# Altium PCB 7688_Board_for_Inner_testing.PcbDoc (part 1 of 2)
Units mil, origin at the board's own origin, x right, y up, seen from the top; angles counter-clockwise.
Board outline 3359.02 x 2098.03 mil, 2 copper layers (Top Layer, Bottom Layer), stack 12.8 mil thick; 105 components, 110 nets, 499 pads, 215 vias.
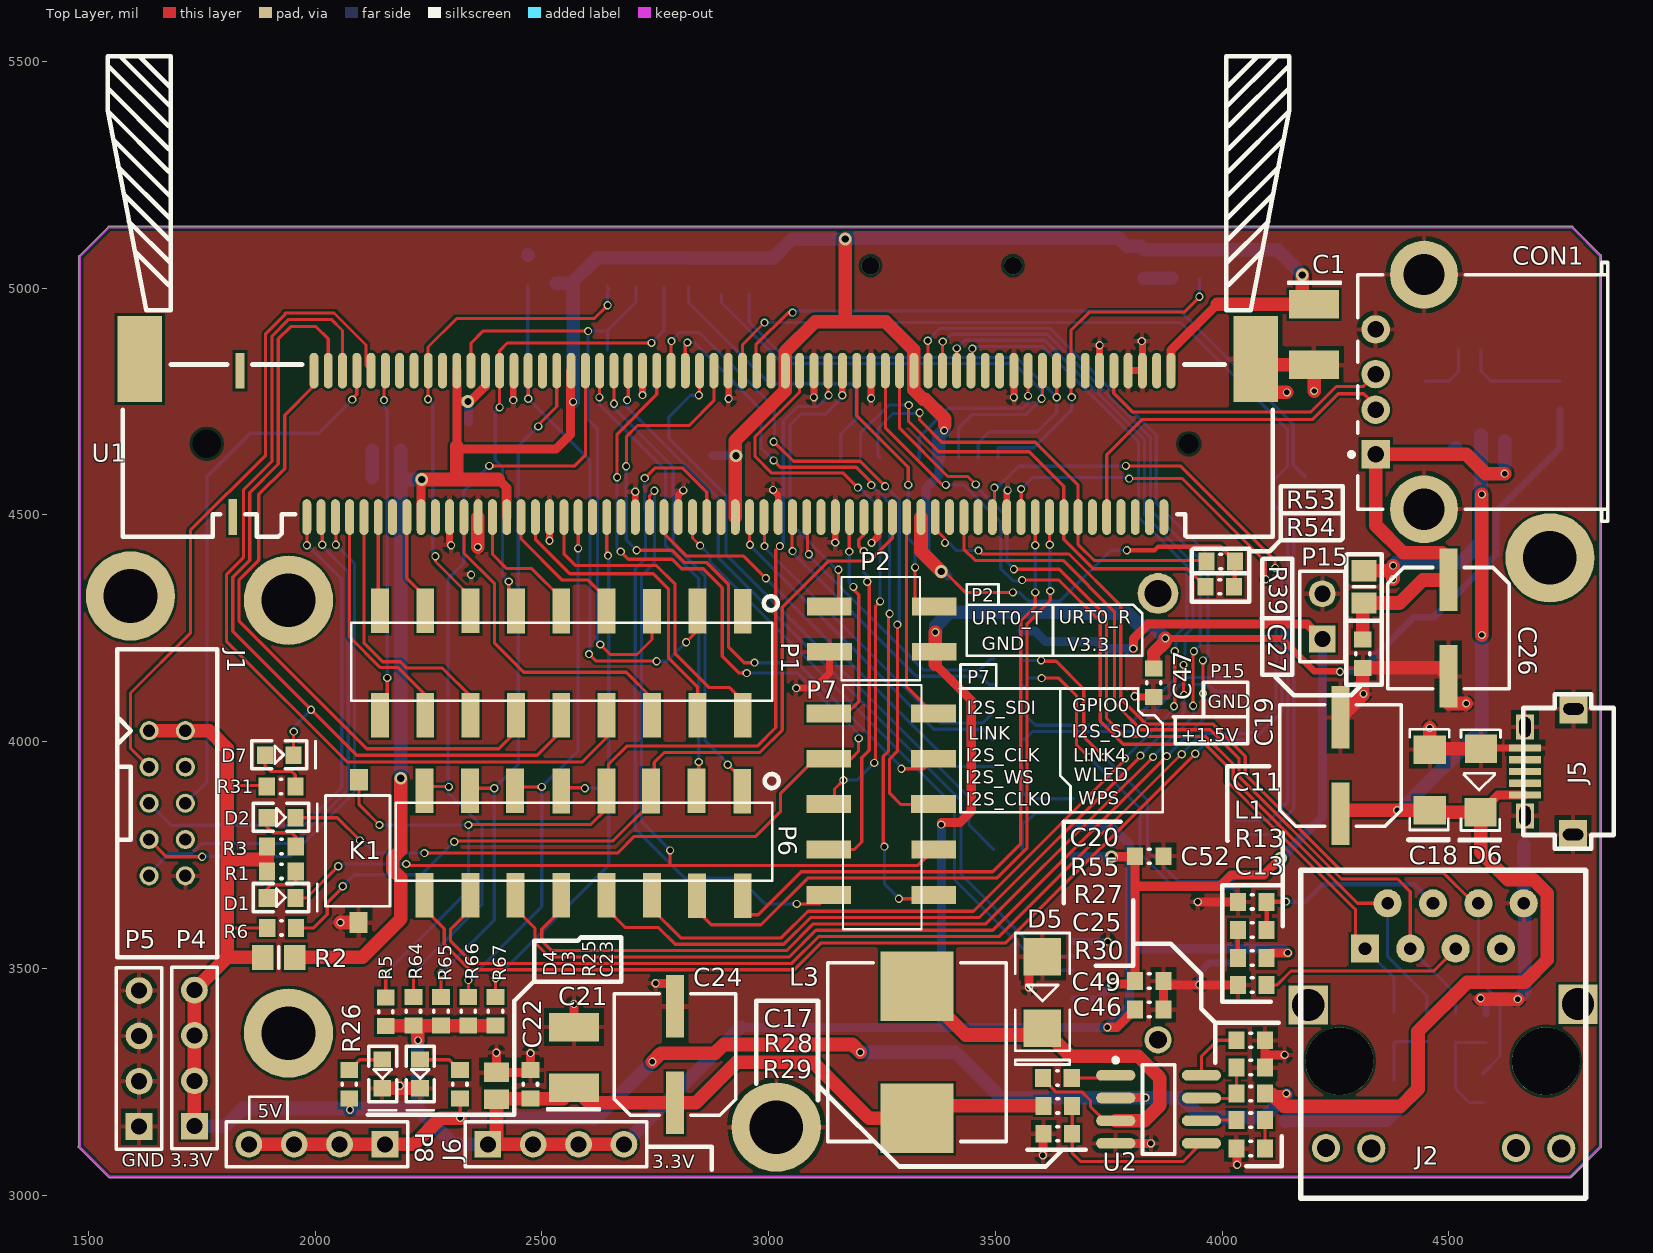
[diagram p0: Top Layer view]
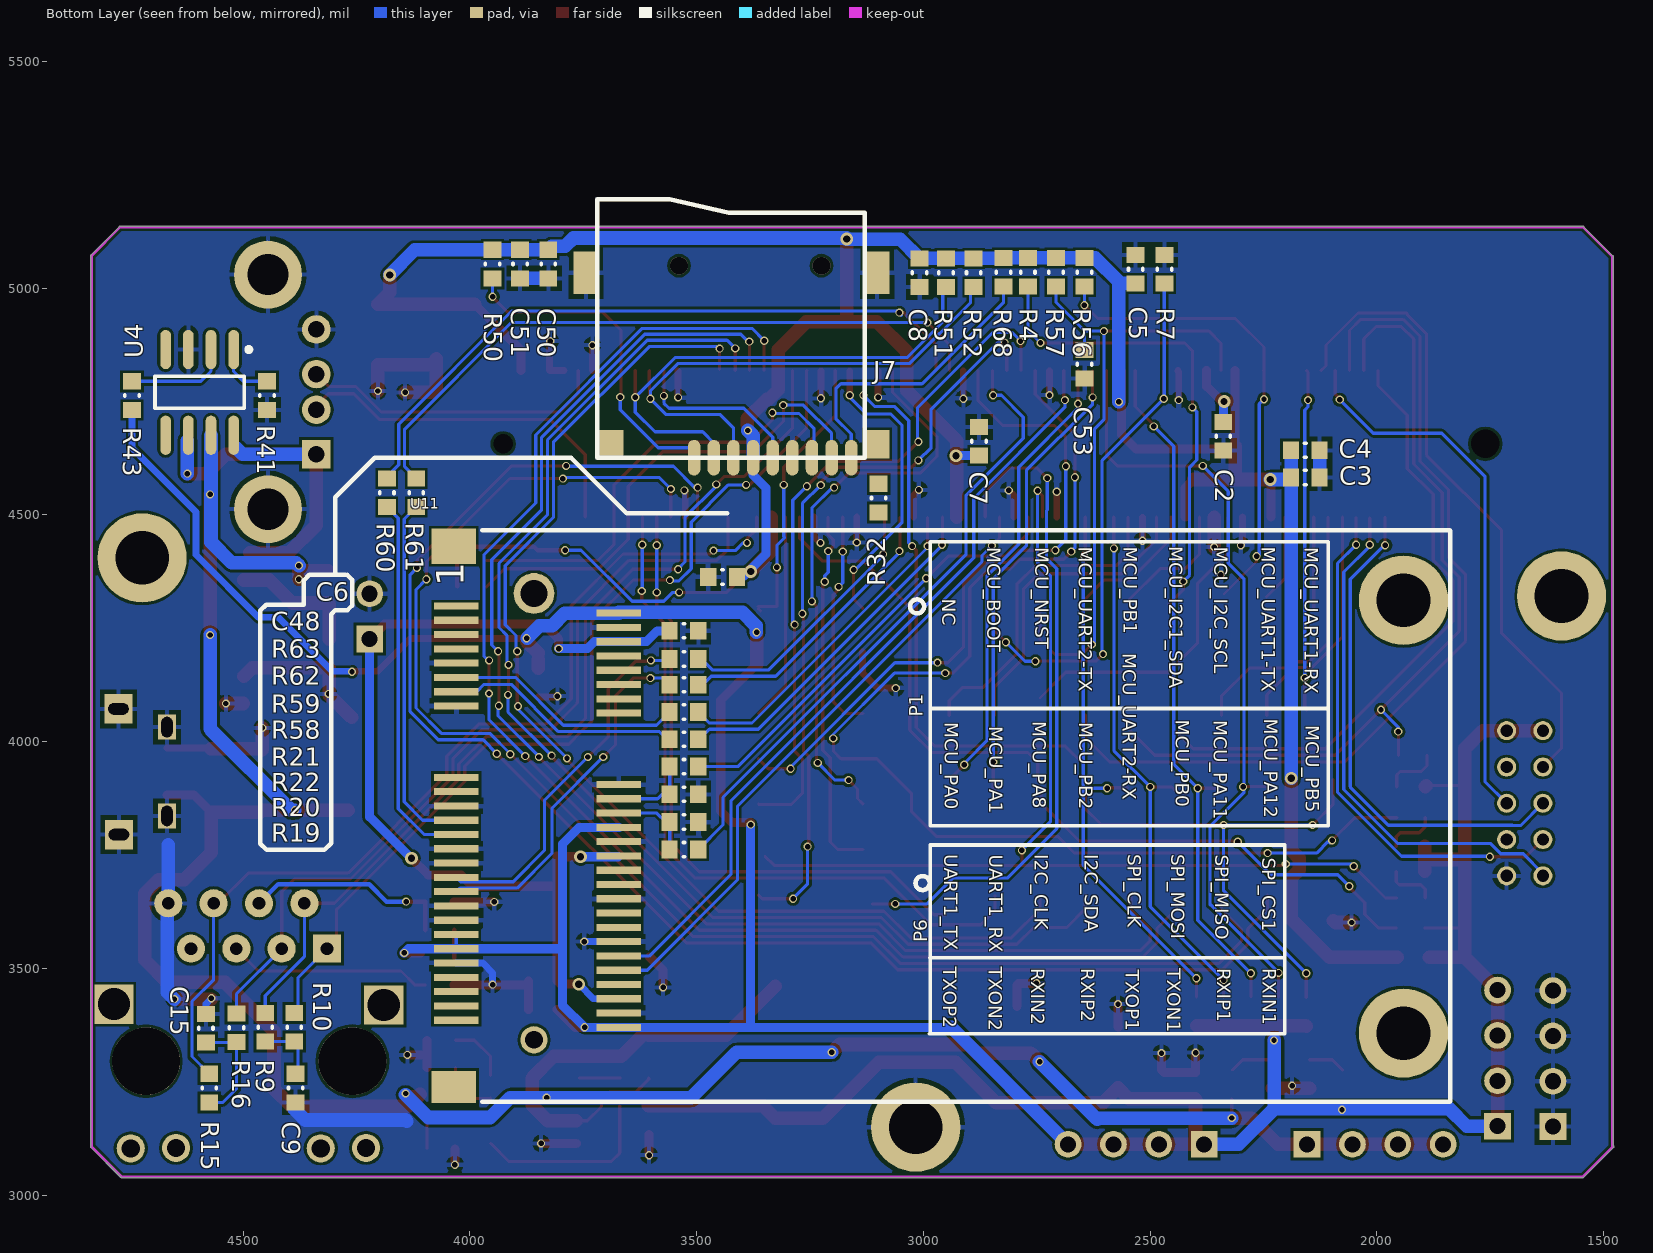
[diagram p1: Bottom Layer view, seen from below]

## Layer stack, top to bottom
Top Solder: solder mask 0.4, Solder Resist, Dk 3.5
Top Layer: signal copper 1.4
Dielectric 1: core 10, FR-4, Dk 4.2
Bottom Layer: signal copper 1.4
Bottom Solder: solder mask 0.4, Solder Resist, Dk 3.5

## Board outline
1478.22,3105.22 cw(c1480,3107) 1478.48,3109.01 1478.48,5069 cw(c1481,5069) 1479.22,5070.78 1544.22,5135.78 cw(c1546,5134) 1546,5136.52 4771,5136.52 cw(c4771,5134) 4772.78,5135.78 4835.78,5072.78 cw(c4834,5071) 4836.52,5071 4836.52,3107 cw(c4834,3107) 4835.78,3105.22 4769.78,3039.22 cw(c4768,3041) 4768,3038.49 1546,3038.49 cw(c1546,3041) 1544.22,3039.22

## Design rules (kind name [scope] priority, off if disabled: settings)
Clearance [All] p1: gap=6
HoleSize [All] p1: absolutevalues=TRUE maxlimit=500 minlimit=1 maxpercent=80.000 minpercent=20.000
HoleToHoleClearance [All] p1: gap=4 allowstackedmicrovias=TRUE
MinimumSolderMaskSliver [All] p1: minsoldermaskwidth=2
PolygonConnect [All] p1: connectstyle=Relief reliefconductorwidth=10 reliefentries=4 polygonreliefangle="90 Angle" airgapwidth=10
RoutingVias [All] p1: holewidth=12 width=18 viastyle="Through Hole" minholewidth=10 minwidth=12 maxholewidth=28 maxwidth=50
SilkToSilkClearance [All] p1: silktosilkclearance=0
SilkToSolderMaskClearance [IsPad] p1: minsilkscreentomaskgap=0 clearancetoexposedcopper=TRUE
SolderMaskExpansion [All] p1: expansion=4
UnpouredPolygon [All] p1: allowunpoured=FALSE
Width [All] p1: maxlimit=30 minlimit=4 preferedwidth=8
24 further rules are at their usual default settings.

## Classes and differential pairs
component class Designator: C1 C2 C3 C4 C5 C6 C7 C8 D1 D2 J1 K1 P1 P2 P4 P5 P6 P7 P8 R1 R2 R3 R4 R5 R6 R7 R56 R57 R64 R65 R66 R67 U1
component class MAIN: R19 R20 R21 R22 R58 R59 R60 R61 R62 R63

## Components (designator, comment, footprint, x,y, rotation, side; value= is the part's Value field where it differs from the comment)
C1 "Cap Pol1" C1210-A 4206,4906 r270 top
C2 "Cap" R0603N 2337,4673 r270 bottom
C3 "Cap" R0603N 2158,4584 r180 bottom
C4 "Cap" R0603N 2158,4644 r180 bottom
C5 "Cap" R0603N 2533.86,5041.69 r90 bottom
C6 "Cap" R0603N 3443,4361 r0 bottom
C7 "Cap" R0603N 2879,4662 r90 bottom
C8 "Cap" R0603N 3007,5034 r270 bottom
C9 "C0603" R0603N 4386,3236 r90 bottom
C11 "C0603" R0603N 4066.54,3648.25 r0 top
C13 "C0603" R0603N 4066.6,3461.25 r180 top
C15 "C0603" R0603N 4584,3368 r90 bottom
C17 "C0603N" R0603N 3637,3260 r0 top
C18 "C0805" C1206-A 4456,3919 r270 top
C19 "Cap" 16V220U-tie 4261,3946 r180 top
C20 "C0603N" R0603N 4063,3343 r0 top
C21 "Cap" C1210-A 2568,3295 r90 top
C22 "C0603N" R0603N 2473,3244.01 r90 top
C23 "C0805N" C0805 2400,3241.09 r270 top
C24 "Cap" 16V220U-tie 2794,3309 r180 top
C25 "C0603N" R0603N 4063,3167 r0 top
C26 "220uF/16V" 16V220U-tie 4499,4251 r0 top
C27 "100nF" R0603N 4312,4194 r270 top
C46 "Cap" R0603N 3839.23,3411 r0 top
C47 "Cap" R0603N 3851,4130 r270 top
C48 "Cap" R0603N 3528,4246 r180 bottom
C49 "Cap" R0603N 3839.23,3474 r0 top
C50 "Cap" R0603N 3829,5053 r90 bottom
C51 "Cap" R0603N 3891,5053 r90 bottom
C52 "Cap" R0603N 3839.23,3749 r0 top
C53 "Cap" R0603N 2643,4832.19 r270 bottom (schematic designator C46)
CON1 "USB-CON" 1364372 4850,4771 r0 top locked
D1 "LED0603" LED0603 1923,3653 r0 top
D2 "LED0603" LED0603 1923,3830 r0 top
D3 "LED0603" LED0603 2229,3269 r270 top
D4 "LED0603" LED0603 2146,3269 r270 top
D5 "Diode" 403D_02 3604,3448 r270 top
D6 "4733/05w" ZMM5V1 4566,3913 r90 top
D7 "LED0603" LED0603 1919,3968 r0 top (schematic designator D4)
J1 "Header 5X2" JTAG-10PIN 1670,3864 r90 top locked
J2 "RJ-45-RH911105A" RJ-45-RH911105A 4490,3327 r270 top locked
J5 "Header 6H" MINIcro-USB-G 4772,3935 r90 top
J6 "Header 4" HDR1X4 2381,3112 r0 top
J7 "TF_CARD" TFP09-2-12B 3410,4812 r180 bottom locked
K1 "Header 2" 3*6key 2089,3755 r270 top
L1 "L0603" R0603N 4066.6,3582.76 r180 top
L3 "10uH" L10*10 3328,3314 r90 top
P1 "Head2*9" Head2*9-tie 2494,4183 r0 top locked
P2 "Head2*2" Head2*2-tie 3250,4248 r90 top locked
P4 "Header 4" HDR1X4 1734,3152 r90 top
P5 "Header 4" HDR1X4 1612,3151 r90 top
P6 "Head2*8" Head2*8_tie 2596,3822 r0 top locked
P7 "Head2*5" Head2*5-tie 3253,3889 r270 top locked
P8 "Header 4" HDR1X4 2154,3112 r180 top
P15 "Head2" HDR1X2 4221,4226 r90 top
R1 "R0603" R0603N 1926,3712 r180 top
R2 "Res Semi" 6-0805_N 1920,3524 r180 top
R3 "R0603" R0603N 1926,3767 r180 top
R4 "Res Semi" R0603N 2706,5035 r270 bottom
R5 "" R0603N 2154,3404 r90 top
R6 "" R0603N 1926,3591 r0 top
R7 "Res Semi" R0603N 2466.86,5041.69 r270 bottom
R9 "R0603" R0603N 4453,3370 r90 bottom
R10 "R0603" R0603N 4389,3370 r90 bottom
R13 "R0603" R0603N 4066.6,3521.25 r180 top
R15 "R0603" R0603N 4573,3236 r270 bottom
R16 "R0603" R0603N 4513,3369 r270 bottom
R19 "" R0603N 3528,3760 r0 bottom
R20 "" R0603N 3528,3821 r0 bottom
R21 "" R0603N 3528,3943 r0 bottom
R22 "" R0603N 3528,3882 r0 bottom
R25 "R0603" R0603N 2321,3244.07 r270 top
R26 "R0603" R0603N 2077,3244.07 r270 top
R27 "R0603N" R0603N 4063.06,3222 r180 top
R28 "R0603N" R0603N 3638,3195 r180 top
R29 "R0603N" R0603N 3638,3133.5 r180 top
R30 "R0603N" R0603N 4063.06,3101 r180 top
R31 "R0603N" R0603N 1925,3899 r180 top (schematic designator R30)
R32 "R0603N" R0603N 3097,4537 r270 bottom (schematic designator R30)
R39 "Res Semi" 6-0805_N 4313,4341 r270 top
R41 "10K" R0603N 4449,4763 r90 bottom
R43 "10K" R0603N 4747,4763 r90 bottom
R50 "Res Semi" R0603N 3952,5053 r90 bottom
R51 "Res Semi" R0603N 2952,5034 r90 bottom
R52 "Res Semi" R0603N 2891,5034 r90 bottom
R53 "Res Semi" R0603N 3997,4399 r0 top
R54 "Res Semi" r0603N 3995,4343 r0 top
R55 "R0603N" R0603N 4063,3283 r0 top
R56 "" R0603N 2643,5035 r270 bottom
R57 "" R0603N 2768,5035 r270 bottom
R58 "" R0603N 3528,4007 r180 bottom
R59 "" R0603N 3528,4067 r180 bottom
R60 "" R0603N 4185,4549 r90 bottom
R61 "" R0603N 4120,4549 r90 bottom
R62 "" R0603N 3528,4127 r180 bottom
R63 "" R0603N 3528,4184 r180 bottom
R64 "" R0603N 2215,3405 r90 top
R65 "" R0603N 2276,3405 r90 top
R66 "" R0603N 2336,3405 r90 top
R67 "" R0603N 2396,3405 r90 top
R68 "Res Semi" R0603N 2825,5035 r90 bottom (schematic designator R52)
U1 "76880-sch-yingyong" MINI-PCI-BZ 2830,4977 r0 top locked
U2 "MP1484" SO8_N 3860,3189 r0 top
U4 "MIC2025-1" SO8_N 4596,4770 r270 bottom
U11 "PCI-E MINI CARD CONNECTOR" MC2716 4030,4299 r90 bottom locked

## Footprints (in the part's own frame and the unit in brackets; to place one, negate y for a bottom-side part, rotate by r counter-clockwise, add the part's x,y. Pads: shape width x height; smd on the part's side, far side on the other; paste and mask are expansions set on the pad)
3*6key [mil]
  rect 47.24x39.37 smd: 1(154,7) 2(-161,8)
  silkscreen extent -126,-66 118,76, body extent -125,-55 116,61, height 50
6-0805_N [mm] "Chip Resistor, Body 2.0x1.2mm, IPC Medium Density"
  rect 1.2x1.4 smd: 1(-0.9,0) 2(0.9,0)
  silkscreen extent 0,-0.6 0,0.6, body extent -1.07,-0.7 1.07,0.7, height 0.7
16V220U-tie [mm]
  rect 1x3.5 smd: 1(0,2.675) 2(0,-2.725)
  silkscreen extent -3.4,-3.43 3.4,3.37, body extent -3.13,-3.17 3.15,3.12, height 6.1
403D_02 [mm]
  rect 2.1x2.1 smd: 1(-1.966,0) 2(2.034,0)
  silkscreen extent -3.3,-1.52 4.06,1.52, body extent -2.55,-1.5 2.65,1.4, height 2.1
1364372 [mm] "Connector; USB1.1, Type A, Thru-Hole; 4 Position; Right Angle"
  rect 1.6x1.6 hole 0.92: 1(-12.99,-3.5)
  round 1.6 hole 0.92: 2(-12.99,-1) 3(-12.99,1) 4(-12.99,3.5)
  round 3.8 hole 2.3: 5(-10.28,6.57) 6(-10.28,-6.57)
  silkscreen extent -14.46,-7.25 0,7.25
C0805 [mm] "Chip Capacitor, Body 2.0x1.3mm, IPC High Density"
  rect 1.1x1.4 smd: 1(-0.75,0) 2(0.75,0)
  body extent -1.1,-0.72 1.1,0.72, height 1.4
C1206-A [mm]
  rect 1.6x1.8 smd: 1(1.791,0.051) 2(-1.609,0.051)
  silkscreen extent -2.74,-1.19 3.51,1.14, body extent -1.99,-0.86 2.21,0.94, height 0.75
C1210-A [mm]
  rect 1.6x2.8 smd: 1(-1.486,-0.076) 2(1.914,-0.076)
  silkscreen extent -2.74,-1.52 -2.64,1.42, body extent -1.91,-0.97 2.29,0.83, height 0.75
HDR1X2 [mm] "Connector; Header; 2 Position"
  rect 1.5x1.5 hole 0.9: 1(0,0)
  round 1.5 hole 0.9: 2(2.54,0)
  silkscreen extent -1.27,-1.27 3.81,1.27
HDR1X4 [mm] "Connector; Header; 4 Position"
  rect 1.5x1.5 hole 0.9: 1(0,0)
  round 1.5 hole 0.9: 2(2.54,0) 3(5.08,0) 4(7.62,0)
  silkscreen extent -1.27,-1.27 8.89,1.27
Head2*2-tie [mm]
  rect 1x2.5 smd: 1(-1.27,-2.921) 2(1.27,-2.921) 3(1.27,2.942) 4(-1.27,2.937)
  silkscreen extent -2.87,-2.13 2.92,2.26, body extent -2.87,-2.17 2.95,2.26, height 8.3
Head2*5-tie [mm]
  rect 1x2.5 smd: 1(-4.394,-3.048) 2(-1.854,-3.048) 3(0.686,-3.048) 4(3.226,-3.048) 5(5.766,-3.048) 6(5.766,2.819) 7(3.226,2.819) 8(0.686,2.81) 9(-1.854,2.815) 10(-4.394,2.81)
  silkscreen extent -5.99,-2.26 7.7,2.13, body extent -5.99,-2.29 7.7,2.13, height 8.3
Head2*8_tie [mm]
  rect 1x2.5 smd: 1(-9.017,-4.089) 2(-6.426,-4.089) 3(-3.912,-4.089) 4(-1.346,-4.089) 5(1.194,-4.089) 6(3.734,-4.089) 7(6.248,-4.115) 8(8.814,-4.115) 9(8.788,1.748) 10(6.223,1.768) 11(3.683,1.753) 12(1.194,1.753) 13(-1.346,1.753) 14(-3.937,1.768) 15(-6.452,1.773) 16(-9.017,1.768)
  silkscreen extent -10.62,-3.28 10.46,1.09, body extent -10.55,-3.33 10.46,1.09, height 8.3
Head2*9-tie [mm]
  rect 1x2.5 smd: 1(-8.915,-3.175) 2(-6.375,-3.175) 3(-3.835,-3.175) 4(-1.295,-3.175) 5(1.245,-3.175) 6(3.785,-3.175) 7(6.325,-3.175) 8(8.865,-3.175) 9(11.405,-3.175) 10(11.405,2.642) 11(8.865,2.662) 12(6.325,2.657) 13(3.785,2.667) 14(1.245,2.667) 15(-1.295,2.667) 16(-3.835,2.683) 17(-6.375,2.688) 18(-8.915,2.683)
  silkscreen extent -10.52,-2.36 13.06,2.01, body extent -10.44,-2.42 13.06,2.04, height 8.3
JTAG-10PIN [mil]
  round 42 hole 27: 1(160,36) 2(160,-44) 3(80,36) 4(80,-44) 5(0,36) 6(0,-44) 7(-80,36) 8(-80,-44) 9(-160,36) 10(-160,-44)
  silkscreen extent -340,-114 340,106
L10*10 [mm]
  rect 3.9x4.1 smd: 1(3.725,0.025) 2(-3.675,0.025)
  silkscreen extent -4.97,-4.97 5.03,5.03, body extent -4.97,-4.97 5.03,5.03, height 5
LED0603 [mm]
  rect 0.9x1 smd: 1(-0.749,0.051) 2(0.851,0.051)
  silkscreen extent -1.5,-0.71 2.08,0.86, body extent -0.82,-0.42 0.93,0.53, height 1.1
MC2716 [mm]
  round 1.524 hole 0.991: 0(-24.3,-4.35)
  round 2.286 hole 1.524: 0(0.7,-4.35)
  rect 0.4x2.5 smd: 1(0,0) 2(-0.4,-9.1) 3(-0.8,0) 4(-1.2,-9.1) 5(-1.6,0) 6(-2,-9.1) 7(-2.4,0) 8(-2.8,-9.1) 9(-3.2,0) 10(-3.6,-9.1) 11(-4,0) 12(-4.4,-9.1) 13(-4.8,0) 14(-5.2,-9.1) 15(-5.6,0) 16(-6,-9.1) 17(-9.6,0) 18(-10,-9.1) 19(-10.4,0) 20(-10.8,-9.1) 21(-11.2,0) 22(-11.6,-9.1) 23(-12,0) 24(-12.4,-9.1) 25(-12.8,0) 26(-13.2,-9.1) 27(-13.6,0) 28(-14,-9.1) 29(-14.4,0) 30(-14.8,-9.1) 31(-15.2,0) 32(-15.6,-9.1) 33(-16,0) 34(-16.4,-9.1) 35(-16.8,0) 36(-17.2,-9.1) 37(-17.6,0) 38(-18,-9.1) 39(-18.4,0) 40(-18.8,-9.1) 41(-19.2,0) 42(-19.6,-9.1) 43(-20,0) 44(-20.4,-9.1) 45(-20.8,0) 46(-21.2,-9.1) 47(-21.6,0) 48(-22,-9.1) 49(-22.4,0) 50(-22.8,-9.1) 51(-23.2,0) 52(-23.6,-9.1)
  round 5 hole 3: 53(-23.92,-53.05) 54(0.316,-53.05)
  rect 1.8x2.5 smd: 55(-26.95,0.15)
  rect 2x2.5 smd: 56(3.35,0.15)
  silkscreen extent -27.77,-55.66 4.24,-1.44
MINI-PCI-BZ [mm]
  rect 2.5x4.8 smd: 0(-30.894,-3.391) 0(31.606,-3.391)
  round 1 hole 1.6 unplated: 0(-27.144,-8.141)
  round 1 hole 1.1 unplated: 0(27.856,-8.141)
  rect 0.5x2 smd: 1(-25.694,-12.241) 2(-25.294,-4.041)
  oval 0.5x2 smd: 3(-21.544,-12.241) 4(-21.144,-4.041) 5(-20.744,-12.241) 6(-20.344,-4.041) 7(-19.944,-12.241) 8(-19.544,-4.041) 9(-19.144,-12.241) 10(-18.744,-4.041) 11(-18.344,-12.241) 12(-17.944,-4.041) 13(-17.544,-12.241) 14(-17.144,-4.041) 15(-16.744,-12.241) 16(-16.344,-4.041) 17(-15.944,-12.241) 18(-15.544,-4.041) 19(-15.144,-12.241) 20(-14.744,-4.041) 21(-14.344,-12.241) 22(-13.944,-4.041) 23(-13.544,-12.241) 24(-13.144,-4.041) 25(-12.744,-12.241) 26(-12.344,-4.041) 27(-11.944,-12.241) 28(-11.544,-4.041) 29(-11.144,-12.241) 30(-10.744,-4.041) 31(-10.344,-12.241) 32(-9.944,-4.041) 33(-9.544,-12.241) 34(-9.144,-4.041) 35(-8.744,-12.241) 36(-8.344,-4.041) 37(-7.944,-12.241) 38(-7.544,-4.041) 39(-7.144,-12.241) 40(-6.744,-4.041) 41(-6.344,-12.241) 42(-5.944,-4.041) 43(-5.544,-12.241) 44(-5.144,-4.041) 45(-4.744,-12.241) 46(-4.344,-4.041) 47(-3.944,-12.241) 48(-3.544,-4.041) 49(-3.144,-12.241) 50(-2.744,-4.041) 51(-2.344,-12.241) 52(-1.944,-4.041) 53(-1.544,-12.241) 54(-1.144,-4.041) 55(-0.744,-12.241) 56(-0.344,-4.041) 57(0.056,-12.241) 58(0.456,-4.041) 59(0.856,-12.241) 60(1.256,-4.041) 61(1.656,-12.241) 62(2.056,-4.041) 63(2.456,-12.241) 64(2.856,-4.041) 65(3.256,-12.241) 66(3.656,-4.041) 67(4.056,-12.241) 68(4.456,-4.041) 69(4.856,-12.241) 70(5.256,-4.041) 71(5.656,-12.241) 72(6.056,-4.041) 73(6.456,-12.241) 74(6.856,-4.041) 75(7.256,-12.241) 76(7.656,-4.041) 77(8.056,-12.241) 78(8.456,-4.041) 79(8.856,-12.241) 80(9.256,-4.041) 81(9.656,-12.241) 82(10.056,-4.041) 83(10.456,-12.241) 84(10.856,-4.041) 85(11.256,-12.241) 86(11.656,-4.041) 87(12.056,-12.241) 88(12.456,-4.041) 89(12.856,-12.241) 90(13.256,-4.041) 91(13.656,-12.241) 92(14.056,-4.041) 93(14.456,-12.241) 94(14.856,-4.041) 95(15.256,-12.241) 96(15.656,-4.041) 97(16.056,-12.241) 98(16.456,-4.041) 99(16.856,-12.241) 100(17.256,-4.041) 101(17.656,-12.241) 102(18.056,-4.041) 103(18.456,-12.241) 104(18.856,-4.041) 105(19.256,-12.241) 106(19.656,-4.041) 107(20.056,-12.241) 108(20.456,-4.041) 109(20.856,-12.241) 110(21.256,-4.041) 111(21.656,-12.241) 112(22.056,-4.041) 113(22.456,-12.241) 114(22.856,-4.041) 115(23.256,-12.241) 116(23.656,-4.041) 117(24.056,-12.241) 118(24.456,-4.041) 119(24.856,-12.241) 120(25.256,-4.041) 121(25.656,-12.241) 122(26.056,-4.041) 123(26.456,-12.241) 124(26.856,-4.041)
  silkscreen extent -32.71,-13.35 33.49,13.58, body extent -31.75,-13.1 32.45,12.81, height 8.81
MINIcro-USB-G [mil]
  rect 16x70 smd: 1(-53,104) 2(-27,104) 3(-1,104) 4(25,104) 5(51,104)
  rect 65x61 hole 25 slot 45 at 90 deg: 6(-140,-2) 6(137,-3)
  rect 55x40 hole 25 slot 45 at 0 deg: 6(-99,104) 6(97,104)
  silkscreen extent -171,-92 169,108
R0603N [mm]
  rect 0.9x1 smd: 1(0.801,-0.044) 2(-0.799,-0.044)
  silkscreen extent -0.05,-0.44 0.05,0.36, body extent -0.87,-0.52 0.88,0.43, height 0.55
r0603N [mm]
  rect 0.9x1 smd: 1(0.801,-0.044) 2(-0.799,-0.044)
  silkscreen extent -0.05,-0.44 0.05,0.36, body extent -0.87,-0.52 0.88,0.43, height 0.55
RJ-45-RH911105A [mil]
  rect 86.61x86.61 hole 70.87: 0(-94,295) 0(-92,-300)
  round 149.61 hole 149.61: 0(32,224) 0(32,-231)
  rect 62x62 hole 28: 1(-216.37,-174.89)
  round 62 hole 28: 2(-316.37,-124.89) 3(-216.37,-74.89) 4(-316.37,-24.89) 5(-216.37,25.11) 6(-316.37,75.11) 7(-216.37,125.11) 8(-316.37,175.11)
  round 62 hole 40: 9(223,-261) 10(224,-161) 11(223,158) 12(224,258)
  silkscreen extent -389,-317 334,312, body extent -385,-302 351,304, height 550
SO8_N [mm] "SOIC, 8-Leads, Body 4.9x3.9mm, Pitch 1.27mm, IPC Medium Density"
  oval 2.2x0.6 smd: 1(-2.4,1.905) 2(-2.4,0.635) 3(-2.4,-0.635) 4(-2.4,-1.905) 5(2.4,-1.905) 6(2.4,-0.635) 7(2.4,0.635) 8(2.4,1.905)
  silkscreen extent -2.52,-2.5 0.9,2.88, body extent -2,-2.5 2,2.5, height 1.75
TFP09-2-12B [mm]
  oval 0.7x2 smd: 1(-2.429,-4.724) 2(-1.329,-4.724) 3(-0.229,-4.724) 4(0.871,-4.724) 5(1.971,-4.724) 6(3.071,-4.724) 7(4.171,-4.724) 8(5.271,-4.724) 9(6.371,-4.724)
  rect 1.4x1.6 smd: 10(-7.079,-3.97) 11(7.825,-3.97)
  rect 1.4x2.4 smd: 12(-8.487,5.63) 13(7.825,5.63)
  silkscreen extent -7.85,-4.72 7.14,9.75
ZMM5V1 [mil]
  rect 62.99x70.87 smd: 1(71,-5) 2(-69,-4)
  silkscreen extent -133,-48 113,44, body extent -82,-40 83,31, height 30

## Part data
C1: "Polarized Capacitor (Radial)"
C2 C3 C4 C5 C6 C7 C8 C19 C21 C24 C46 C47 C48 C49 C50 C51 C52 C53: "Capacitor"
C9 C11 C13 C15 C18: library part "Cap Semi", "Capacitor (Semiconductor SIM Model)"
C17 C20 C22 C23 C25: library part Cap, "Capacitor"
C26: library part "Cap Pol1", "Polarized Capacitor (Radial)"
C27: library part CAP
D1 D2 D3 D4 D7: library part LED, "LED"
D5: "Default Diode"
D6: library part Diode, "Default Diode"
J1: "Header, 5-Pin, Dual row"
J5: "Header, 6-Pin, Right Angle"
J6 P4 P5 P8: "Header, 4-Pin"
J7 U2: library part Component_1
K1: "Header, 2-Pin"
L1 L3: library part Inductor, "Inductor"
R1 R3 R5 R6 R9 R10 R13 R15 R16 R19 R20 R21 R22 R25 R26 R56 R57 R58 R59 R60 R61 R62 R63 R64 R65 R66 R67: library part "Res Semi", "Semiconductor Resistor"
R2 R4 R7 R39 R50 R51 R52 R53 R54 R68: "Semiconductor Resistor"
R27 R28 R29 R30 R31 R32 R55: library part Res2, "Resistor"
R41 R43: library part RES

## Free pads (board coordinates)
  round 196.85 hole 118.11: 0(1593,4321) 0(3017,3150) 0(4723,4405)

## Via types
v1: diameter 18, hole 12, Top Layer to Bottom Layer, 203 vias
v2: diameter 28, hole 16, Top Layer to Bottom Layer, 10 vias
v3: diameter 39.37, hole 39.37, Top Layer to Bottom Layer, 2 vias

## Nets (pads, with @x,y where several pads share a name; then routed paths per layer and width w, separated by ;. In a path a pad name is that pad's centre, name@x,y a point inside that pad or via, vN(x,y) a via of type N, cw(c..) or ccw(c..) an arc to the next point about the centre after c; other vN are vias at no path point)
+1.5V: C48.2 C49.2 C52.2 P15.1 U11.6 U11.28 U11.48 | length 2161.3
  Top Layer w20: v2(3756,3746) C52.2@3802.28,3746 ; v2(3760,3465) C49.2@3800.51,3465 ; v1(3804.24,4204.93) 3804.24,4226.24 3837,4259 4188,4259 P15.1@4208,4239 ; C49.2@3807.76,3472.25 C52.2@3807.76,3747.25 ; 3811,3681 3995,3681 4020,3706 4092,3706 v2(4129,3743) ; P15.1@4221,4226 P15.1@4208,4239 ; P15.1@4232,4239 P15.1@4208,4239
  Bottom Layer w15: U11.48@3671.73,3432.86 3727.86,3432.86 v2(3760,3465)
  Bottom Layer w20: C48.2@3559.46,4244.25 3586.75,4244.25 3610.74,4220.26 U11.6@3671.73,4220.26 3725.74,4220.26 3741.07,4204.93 v1(3804.24,4204.93) ; U11.28@3673.55,3746 v2(3756,3746) ; v2@4129.5,3742.5 4221,3834 P15.1@4221,4226
C_5V: C26.1 C27.2 CON1.1 R39.2 U4.6 U4.8 | length 1168.7
  Top Layer w30: C27.2@4310.25,4225.46 R39.2@4310.25,4302.82 ; R39.2@4313,4305.57 4391.57,4305.57 4442.3,4356.3 C26.1@4499,4356.3 ; C26.1@4484.96,4416.54 4399.38,4416.54 4338.58,4477.33 CON1.1@4338.58,4633.2 4538.8,4633.2 4581,4591 v1(4623,4591)
  Bottom Layer w30: CON1.1@4338.58,4633.2 4501.2,4633.2 U4.8@4515.24,4647.24 ; v1(4623,4591) U4.6@4623,4663.51
D0: J7.7 R53.2 U1.111 | length 1025
  Top Layer w7: v1(3333,4725) 3333,4709 3382,4660 3588,4660 3682.58,4565.42 U1.111@3682.58,4495.09 3682.58,4434.42 3717.75,4399.25 R53.2@3964.54,4399.25
  Bottom Layer w7: J7.7@3245.77,4626 3241,4630.77 3241,4690 3274.5,4723.5 3331.5,4723.5 v1(3333,4725)
D1: J7.8 R54.2 U1.109 | length 1096.8
  Top Layer w7: v1(3309,4742) 3308.5,4741.5 3308.5,4705.92 3375.42,4639 3575,4639 3651.09,4562.91 U1.109@3651.09,4495.09 3651.09,4445.91 3715.94,4381.06 3923.73,4381.06 R54.2@3963.54,4341.25
  Bottom Layer w7: J7.8@3202.47,4626 3202.47,4679.47 3265,4742 v1(3309,4742)
D2: J7.1 R50.2 U1.110 | length 748.5
  Top Layer w7: v1@3666.83,4758.17 U1.110@3666.83,4817.92 3666.83,4906.83 3707,4947 3917,4947 v1@3949,4979
  Bottom Layer w7: J7.1@3505.61,4626 3505.61,4648 3585,4648 3668.5,4731.5 v1(3668.5,4759.5) ; v1(3950,4981) R50.2@3950,5021.28
D3: J7.2 R51.2 U1.108 | length 1133.3
  Top Layer w7: v1(3635.34,4759.34) U1.108@3635.34,4817.92
  Bottom Layer w7: R51.2@2957.25,4986.54 2957.25,4925.13 3035.38,4847 3547.68,4847 v1(3635.34,4759.34) 3635.34,4726.34 3592,4683 3487,4683 3462.31,4658.31 J7.2@3462.31,4626
D7_1: D7.1 R31.2 | length 125.7
  Top Layer w7: D7.1@1889.5,3970 1889.5,3946.5 1902,3934 1949,3934 1956.46,3926.54 R31.2@1956.46,3900.75 R31.2@1956.46,3899.54
D7_2: 
DGND: C1.2 C2.1 C3.1 C4.1 C5.1 C6.1 C7.1 C8.1 C9.2 C11.2 C13.1 C15.1 C18.2 C19.2 C20.1 C21.2 C22.1 C23.1 C24.2 C26.2 C27.1 C46.1 C47.1 C48.1 C49.1 C50.2 C51.2 C52.1 C53.1 CON1.4 CON1.5 CON1.6 D3.2 D4.2 D5.1 D6.1 J1.10 J2.8 J5.5 J5.6 J7.6 J7.12 J7.13 K1.1 P2.4 P5.1 P5.2 P5.3 P5.4 P15.2 pad.0@3017,3150 R7.2 R20.2 R22.2 R29.1 R30.1 R41.2 R55.1 U1.0@4074.32,4843.51 U1.23 U1.27 U1.32 U1.37 U1.49 U1.50 U1.55 U1.62 U1.69 U1.74 U1.77 U1.82 U1.83 U1.101 U1.102 U1.114 U1.118 U1.120 U2.4 U4.3 U11.4 U11.9 U11.15 U11.18 U11.21 U11.26 U11.27 U11.29 U11.34 U11.35 U11.37 U11.40 U11.43 U11.50 | length 4260.2
  Top Layer w15: v1@2296.76,4439.76 U1.23@2296.76,4495.09 ; v1(2437,4753) 2437,4815.41 2439,4817.41 U1.32@2438.49,4817.92 ; v1(2517,4443) U1.37@2517,4494.86 ; U1.49@2706.2,4495.09 v1@2706.2,4550.8 ; v1(2722,4764) U1.50@2721.95,4817.92 ; U1.55@2800.69,4495.09 2800.69,4542.69 v1(2812,4554) ; v1(2912,4756) U1.62@2912,4816.85 ; v1(3010,4555) 3021.17,4543.83 U1.69@3021.17,4495.09 ; v1(3061,4118) 3101,4118 3134.39,4151.39 P2.4@3134.39,4198 ; v1(3100,4759) U1.74@3100,4817.83 ; v1(3147,4439) 3147,4494.94 U1.77@3147.15,4495.09 ; v1(3226,4757) U1.82@3226,4817.81 ; v1(3227,4438) 3241.64,4452.64 U1.83@3241.64,4495.09 ; U1.101@3525.1,4495.09 v1@3525.1,4552.1 ; v1(3541,4759) U1.102@3541,4817.77 ; U1.114@3729.83,4817.92 3729.83,4873.83 v1(3730,4874) ; U1.118@3792.82,4817.92 U1.120@3824.31,4817.92 v1@3824.31,4883 ; v1(3807,4100) 3808.53,4098.47 C47.1@3849.25,4098.47 ; D6.1@4573,3986 J5.5@4668,3986
  Top Layer w20: v1(2400,3314) C23.1@2400,3270.61 2469.83,3270.61 C22.1@2474.75,3275.54 v1@2474.75,3311.75 ; C21.2@2569.57,3370.36 C21.2@2571,3370.36 v1(2571,3421) ; v1(2751,3467) 2790,3467 2794,3463 C24.2@2794,3416.3 ; v1(3574,3458) 3574,3495.4 D5.1@3604,3525.4 ; v1(3605,3088) R29.1@3605,3133.78 ; U2.4@3765.51,3114 v1(3843,3114) ; C46.1@3870.76,3409.25 C49.1@3870.76,3472.25 ; C49.1@3880.01,3463 C13.1@4035.07,3463 ; v1@3948.5,3646.5 C11.2@4035.07,3646.5 ; v1(4033,3067) R30.1@4033,3101.28 ; R55.1@4094.53,3281.25 C20.1@4094.53,3341.25 ; 4096.53,3309 v1(4138,3309) ; D6.1@4571,3984 D6.1@4573,3986
  Top Layer w30: v1(2056,3601) 2092,3601 K1.1@2096,3605 ; D4.2@2148,3235.5 D3.2@2231,3235.5 ; v1(2359,4429) 2359.09,4429.09 U1.27@2359.09,4494.43 ; U1.0@4074.32,4843.51 4074.32,4781.69 4086,4770 v1(4143,4770) ; U1.0@4087.19,4830.64 C1.2@4203,4830.64 v1(4203,4773) ; C19.2@4261,4053.3 4310.25,4102.55 C27.1@4310.25,4162.47 4480.23,4162.47 C26.2@4499,4143.7 ; C18.2@4458,3982.36 v1(4458,4030) ; C18.2@4459.64,3984 D6.1@4571,3984 ; C26.2@4500,4084 v1(4538,4084) ; v1@4571,3432 v1(4652,3432)
  Bottom Layer w15: U11.40@3671.89,3559 v1(3748,3559) ; v1(3950,3464) 3950,3490 3971.6,3511.6 U11.43@4030,3511.6 ; v1(4570,3434) 4582.25,3421.75 C15.1@4582.25,3399.53
  Bottom Layer w30: C3.1@2126.47,4582.25 C4.1@2126.47,4642.25 ; R7.2@2468.61,5073.16 R7.2@2469.55,5072.22 ; C50.2@3827.25,5021.54 C51.2@3889.25,5021.54 ; 4139,3163 4141.64,3165.64 4363.36,3165.64 C9.2@4387.25,3189.54 ; v1(4652,3432) 4667.11,3447.11 4667.11,3641.37 J2.8@4665.11,3643.37 4665.11,3771.89
  other v1: 2187,3241 2475,3313 3946.39,3646.5 4311.88,4105 2344,4368 2300,4433 2706,4551 3527,4554 3823,4883
DM1: CON1.2 U1.115 | length 806
  Top Layer w7: U1.115@3745.57,4495.09 3745.57,4632.57 3823,4710 4199,4710 4256,4767 4312,4767 4338.58,4740.42 CON1.2@4338.58,4731.63
DP1: CON1.3 U1.116 | length 678.9
  Top Layer w7: U1.116@3761.32,4817.92 3761.32,4767.68 3802,4727 4196,4727 4252,4783 4311.21,4783 CON1.3@4338.58,4810.37
GPIO0: P7.10 U1.87 | length 457.6
  Top Layer w7: U1.87@3304.63,4495.09 3304.5,4494.96 3304.5,4121.11 P7.10@3363.61,4062
I2C_CLK: P6.11 R6.1 U1.85 | length 1916
  Top Layer w7: R6.1@1957.53,3589.25 1997.25,3589.25 2027,3619 2027,3645 v1@2062,3680 ; v1(2307,3779) 2309,3781 2657,3781 2741,3865 P6.11@2741,3891 ; P6.11@2748,3913 2748,3954 2770,3976 2980.8,3976 3030,4025.2 3030,4296.2 3132.3,4398.5 3223.5,4398.5 3273.13,4448.13 U1.85@3273.13,4495.09
  Bottom Layer w7: v1(2061,3681) 2086.5,3706.5 2234.5,3706.5 v1(2307,3779)
I2C_SDA: K1.2 P6.12 R5.1 U1.76 | length 2422
  Top Layer w7: K1.2@2097,3916 2097,3861 v1(2142,3816) ; R5.1@2156,3435.78 v1(2156,3489) ; v1@2339.5,3817.5 2608.5,3817.5 2643,3852 P6.12@2643,3891 ; P6.12@2647,3903 2647,3950 2687,3990 2975,3990 3016,4031 3016,4422 v1(3025,4431) ; v1@3131.4,4768.4 U1.76@3131.4,4817.92
  Bottom Layer w7: v1(2142,3816) v1(2338,3816) 2338,3671 v1(2156,3489) ; 3032.5,4438.5 3032.5,4707.5 3064,4739 3108,4739 v1(3132.5,4763.5)
I2S_CLK: P7.3 U1.72 | length 1269
  Top Layer w7: U1.72@3068.41,4817.92 3068.41,4770.76 2970,4672.35 2970,4629 3007,4592 3165,4592 v1(3197,4560) ; P7.3@3133,3862 3145.5,3874.5 3145.5,3895.5 v1(3165,3915) ; v1@3236,3953 3236,4299 v1(3246,4309)
  Bottom Layer w7: v1(3165,3915) 3195,3915 v1(3233,3953) ; v1(3197,4560) 3201,4560 3246,4515 v1(3246,4309)
I2S_CLK0: P7.5 U1.59 | length 1481.4
  Top Layer w7: v1(2727,4581) 2749,4603 2810.69,4603 2863.69,4550 U1.59@2863.69,4495.09 ; v1(3062,3642) 3113,3642
  Bottom Layer w7: v1(2727,4581) 2727,4511 2728.5,4509.5 2728.5,4403.5 2706,4381 2706,3808 2815,3699 2935,3699 2992,3642 v1(3062,3642)
I2S_SDI: P7.1 U1.79 | length 492.8
  Top Layer w7: P7.1@3133,4062 3173,4062 3199,4088 3199,4324 3187,4336 v1(3187,4341) ; v1(3178,4419) 3178,4494.44 U1.79@3178.65,4495.09
  Bottom Layer w7: v1(3178,4419) 3178,4350 v1(3187,4341)
I2S_SDO: P7.9 U1.60 | length 1488.7
  Top Layer w7: v1@2687,4613 2687,4673 2711,4697 2825,4697 2879.43,4751.43 U1.60@2879.43,4817.92 ; v1(2709,4422) 2787.2,4422 2814.2,4395 2863,4395 2912,4346 2912,4208 2946,4174 v1(2969,4174) ; v1(3293,3940) 3341.82,3940 P7.9@3363.82,3962
  Bottom Layer w7: v1(2686,4607) 2686,4445 v1(2709,4422) ; v1(2969,4174) 3063,4174 v1@3293,3944
I2S_WS: P7.4 U1.81 | length 817.1
  Top Layer w7: P7.4@3133,3762 3189,3762 3205.5,3778.5 3205.5,3964.5 3222,3981 3222,4348 v1(3217.5,4352.5) ; v1@3210.14,4420.14 v1(3210,4420) 3199,4431 3199,4445 3210.14,4456.14 U1.81@3210.14,4495.09
  Bottom Layer w7: v1(3210,4420) 3210,4373 3217.5,4365.5 v1(3217.5,4352.5)
LINK0: U1.48 U11.42 | length 1738.4
  Top Layer w7: v1@2690.46,4755.46 U1.48@2690.46,4817.92
  Bottom Layer w7: v1(2688,4753) 2688,4737 2889,4536 2889,4405 3424,3870 3424,3708 3605,3527 U11.42@3654,3527 ; U11.42@3650.65,3527.35 U11.42@3671.73,3527.35
LINK1: R21.2 U1.53 | length 976
  Top Layer w7: U1.53@2769.2,4495.09 2769.2,4459.8 2820,4409 2945,4409 v1(2994,4360)
  Bottom Layer w7: v1(2994,4360) 3409.25,3944.75 R21.2@3496.54,3944.75
LINK2: D2.2 P7.2 U1.52 | length 2649.9
  Top Layer w7: D2.2@1956.5,3832 2049,3832 v1(2099,3782) ; v1@2098.5,3777 v1@2099,3777 ; v1@2248,3754 2667,3754 2704,3791 2972,3791 3026,3845 3026,3885 3103,3962 P7.2@3133,3962 3182,3962 3198,3978 3198,4006 v1(3199,4007) ; v1(2666,4583) 2666,4678 2753.45,4765.45 U1.52@2753.45,4817.92 ; v1(2674,4419) 2690.8,4402.2 2787.2,4402.2 2808.4,4381 2856,4381 2898,4339 2898,4188.2 2935.2,4151 v1(2952,4151)
  Bottom Layer w7: v1(2099,3782) 2104,3777 2107,3780 2133,3754 v1(2241,3754) ; v1(2666,4583) 2666,4427 v1(2674,4419) ; v1(2952,4151) 3064,4151 3205,4010 3202,4007 v1(3199,4007)
LINK3: U1.57 U11.44 | length 1383.6
  Top Layer w7: U1.57@2832.19,4495.09 2832.19,4448.81 v1(2849,4432)
  Bottom Layer w7: v1(2849,4432) 2870.79,4410.21 2870.79,4396.79 3410,3857.58 3410,3695 3609.15,3495.85 U11.44@3671.73,3495.85
LINK4: P7.8 U1.54 | length 1536.3
  Top Layer w7: U1.54@2784.94,4817.92 v1@2784.94,4881.94 ; v1@3011.5,4661.5 3055,4618 3202,4618 v1(3257,4563) ; v1(3284,4258) 3284,3978.5 3267,3961.5 3267,3886 3292,3861 3362.61,3861 P7.8@3363.61,3862
  Bottom Layer w7: v1(2786,4883) 2786,4884 2804,4902 2847,4902 3013,4736 3013,4663 v1(3011,4661) ; v1(3257,4563) 3288,4532 3288,4262 v1(3284,4258)
MCU_BOOT: P1.11 R7.1 U1.34 | length 1238.6
  Top Layer w7: v1(2469.98,4756) U1.34@2469.98,4817.92 ; v1(2604,4193) 2619,4178 v1@2753,4178 ; v1(2818,4219) 2843,4244 P1.11@2843,4287.8
  Bottom Layer w7: R7.1@2469,5004.17 2469,4757 2606,4620 v1@2606,4201 ; v1(2753,4177) 2776,4177 v1(2818,4219)
MCU_I2C1_SCL: P1.16 R56.1 U1.20 | length 1055.9
  Top Layer w7: v1(2249,4755) U1.20@2249,4817.41 ; U1.20@2249.51,4817.92 2249,4818.43 2249,4870 2312,4933 2616,4933 v1(2645,4962) ; v1(2265.5,4408.5) 2265.5,4397.11 P1.16@2337.31,4325.31
  Bottom Layer w7: v1(2249,4755) 2259.5,4744.5 2259.5,4411.5 v1@2264,4407 ; R56.1@2644.75,5003.47 R56.1@2644.75,5004.47 ; v1(2645,4962) 2645,4995.35 R56.1@2648.93,4999.29
MCU_I2C1_SDA: P1.15 R57.1 U1.30 | length 1066.5
  Top Layer w7: v1(2407,4737) U1.30@2406.99,4817.92 ; U1.30@2406.99,4817.92 2406.99,4861.99 2424,4879 v1(2741.8,4879) ; v1(2427,4353) 2427,4335 P1.15@2459,4303
  Bottom Layer w7: v1(2407,4737) 2397.31,4727.31 2397.31,4620.85 2413,4605.16 2413,4367 v1(2427,4353) ; v1(2741.8,4879) 2769.75,4906.95 R57.1@2769.75,5003.47
MCU_JNTRST: J1.3 U1.12 | length 1428
  Top Layer w7: J1.3@1634,3944 1593,3985 1593,4107 1725,4239 1725,4465.74 1891,4631.74 1891,4899.6 1934,4942.6 1934,4945 2041.8,4945 2112.37,4874.42 2112.37,4829.07 U1.12@2123.53,4817.92
MCU_JTCK: J1.9 U1.5 | length 1135.9
  Top Layer w7: v1(2016,4434) U1.5@2016,4492.38
  Bottom Layer w7: J1.9@1634,3709 1677.5,3752.5 1727.05,3752.5 1750.11,3775.56 1954.59,3775.56 2072.52,3893.48 ; v1(2016,4434) 2016,4431 2073,4374 2073,3894.97
MCU_JTDI: J1.5 U1.3 | length 1107.1
  Top Layer w7: v1(1982,4433) U1.3@1982,4494.88
  Bottom Layer w7: J1.5@1634,3864 1683,3815 1700.45,3815 1700.95,3815.5 1974.73,3815.5 2058.63,3899.4 ; v1(1982,4433) 1984,4433 2059,4358 2059,3900.77
MCU_JTDO: J1.6 U1.10 | length 1198.4
  Top Layer w7: v1@2081,4755 2092.03,4766.03 U1.10@2092.03,4817.92
  Bottom Layer w7: J1.6@1714,3864 1762,3912 1762,4585 1857,4680 2008,4680 v1(2082,4754)
MCU_JTMS: J1.7 U1.7 | length 1150.9
  Top Layer w7: J1.7@1634,3784 1672,3746 v1(1751,3746) ; v1(2046,4434) U1.7@2046,4493.87
  Bottom Layer w7: v1@1750,3747 1945.83,3747 2087,3888.17 2087,4393 v1(2046,4434)
MCU_NRST: C53.2 P1.12 R4.1 U1.26 | length 1439.6
  Top Layer w7: U1.26@2344,4817.92 2344,4879 2370,4905 v1(2602,4905) ; v1(2629,4214) 2651,4192 2710,4192 2743,4225 P1.12@2743,4287.61
  Bottom Layer w7: v1(2629,4214) 2622.5,4220.5 2622.5,4689.5 2602,4710 v1(2602,4905) 2644.25,4905 ; C53.2@2644.75,4863.65 2644.75,4905.75 2707.75,4968.75 R4.1@2707.75,5003.47
MCU_PA0: P1.9 U1.39 | length 731
  Top Layer w7: U1.39@2548.72,4495.09 2548.72,4414.28 2575,4388 2753,4388 2794,4347 2794,4194 2869,4119 2914,4119 2943,4090 P1.9@2943,4058
MCU_PA1: P1.8 U1.35 | length 692.9
  Top Layer w7: U1.35@2485.73,4495.09 2485.73,4446.27 2562,4370 2746,4370 2779,4337 2779,4185 2843,4121 P1.8@2843,4058
MCU_PA8: P1.7 U1.25 | length 703.3
  Top Layer w7: U1.25@2328.25,4495.09 2328.25,4415.75 2396,4348 2396,4217 2460,4153 2686,4153 P1.7@2743,4096
MCU_PA11: P1.3 U1.11 | length 603.4
  Top Layer w7: U1.11@2107.78,4495.09 2107.78,4217.61 2149.38,4176 2188.38,4176 2202.38,4162 2281,4162 2343,4100 P1.3@2343,4058
MCU_PA12: P1.2 U1.9 | length 529
  Top Layer w7: U1.9@2076.28,4495.09 2076.28,4230.72 2144,4163 2183,4163 2243,4103 P1.2@2243,4058